# Altium PCB ALTAIR_PD_Soldier_V26.4c.PcbDoc (part 4 of 4)
Units mm, origin at the board's own origin, x right, y up, seen from the top; angles counter-clockwise.
Board outline 74 x 56 mm, 4 copper layers (Top Layer, Layer 1, Layer 2, Bottom Layer), stack 1.675 mm thick; 191 components, 116 nets, 579 pads, 435 vias.
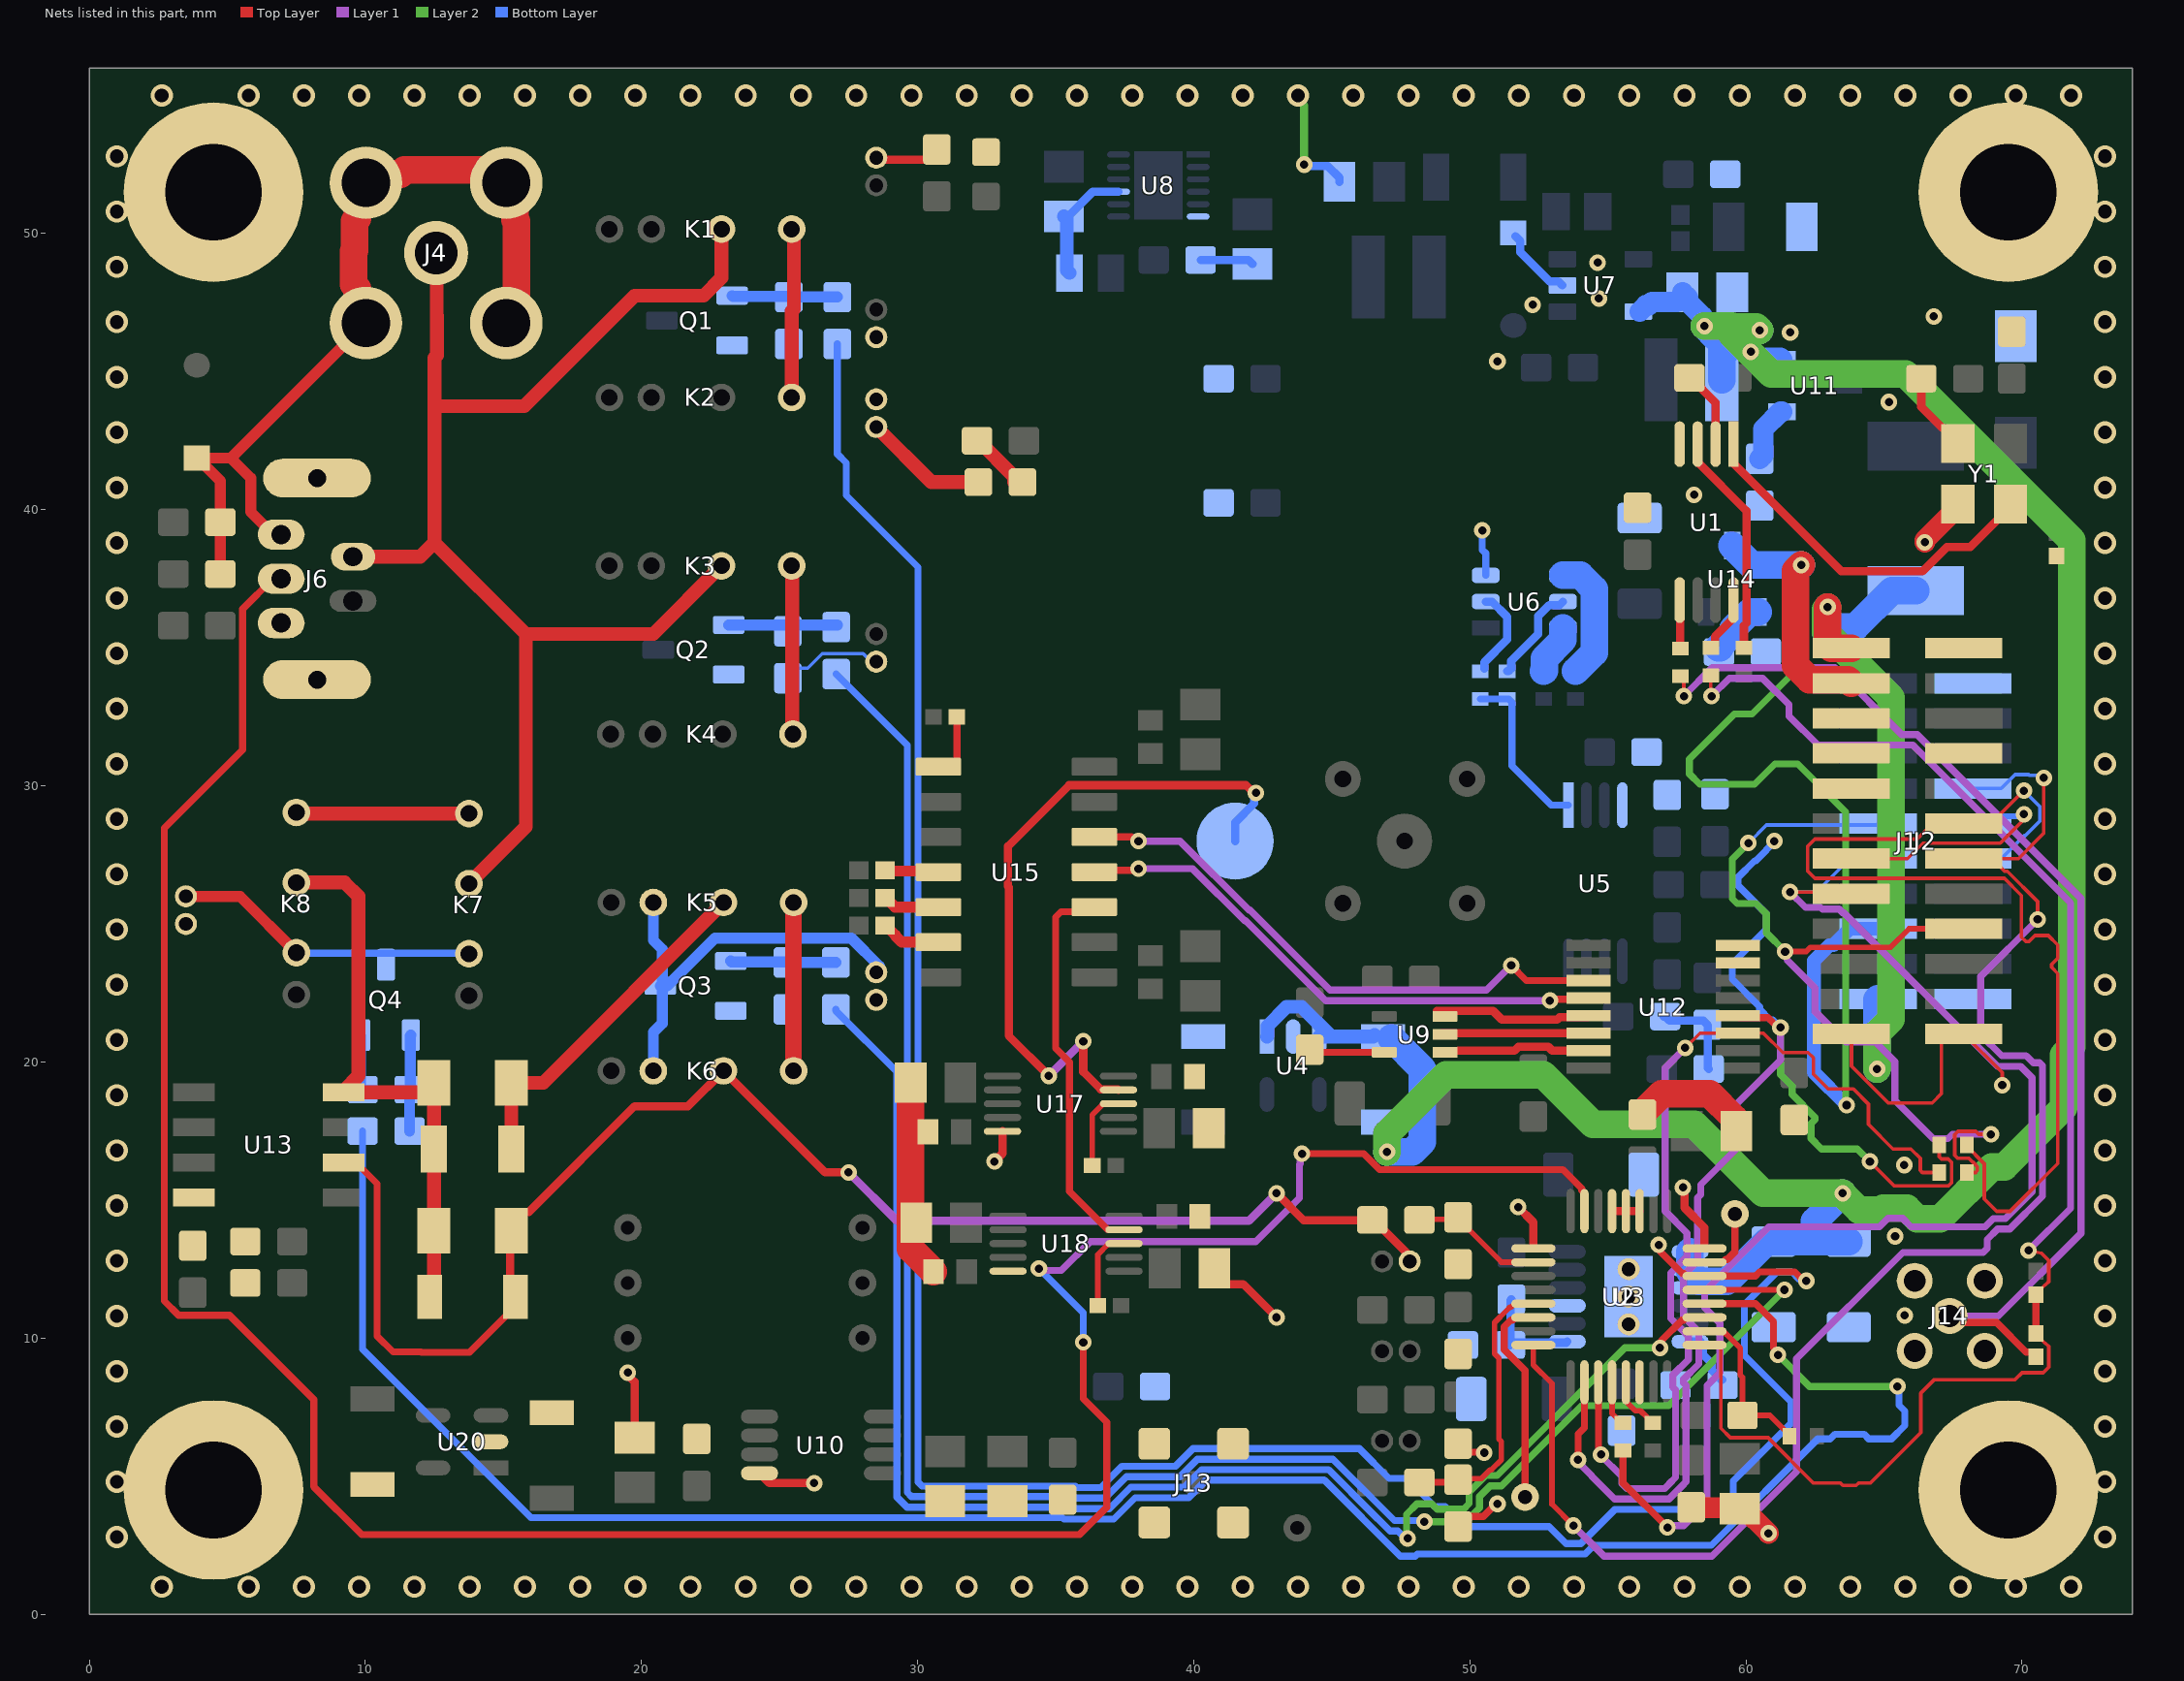
[diagram p5: the nets of this part, all layers, seen from the top]

## Via types
v1: diameter 0.6, hole 0.3, Top Layer to Bottom Layer, tented both sides, 157 vias
v2: diameter 0.6, hole 0.3, Top Layer to Bottom Layer, 156 vias
v3: diameter 0.8, hole 0.5, Top Layer to Bottom Layer, 122 vias

## Nets (pads, with @x,y where several pads share a name; then routed paths per layer and width w, separated by ;. In a path a pad name is that pad's centre, name@x,y a point inside that pad or via, vN(x,y) a via of type N, cw(c..) or ccw(c..) an arc to the next point about the centre after c; other vN are vias at no path point) (continued)
NetD5_1: D5.1 R54.1 | length 2.1
  Top Layer w0.5: R54.1@32.15,42.5 32.2,42.5 33.5,41.2 D5.1@33.5,41
NetD5_2: D5.2 JLEDN1.1 | length 4.5
  Top Layer w0.5: JLEDN1.1@28.5,43 30.5,41 D5.2@32.2,41
NetJ6_3: J6.3 U2.31 | length 101.3
  Top Layer w0.254: J6.3@6.95,37.5 6.65,37.5 5.551,36.401 5.551,31.305 2.719,28.473 2.719,11.345 3.238,10.826 5.076,10.826 8.131,7.771 8.131,4.619 9.86,2.89 35.865,2.89 36.849,3.875 36.849,6.958 36,7.807 v1(36,9.853) ; v1(43.921,16.681) 46.152,16.681 46.732,16.101 53.37,16.101 54.054,15.417 54.054,15.358 54.15,15.262 U2.31@54.15,14.6
  Layer 1 w0.254: v1(34.395,12.52) 34.461,12.454 34.947,12.454 34.949,12.453 35.203,12.453 36.25,13.5 42.25,13.5 43.825,15.075 43.825,16.296 43.855,16.327 43.855,16.615 v1(43.921,16.681)
  Bottom Layer w0.254: v1@34.5,12.5 34.5,12.415 36,10.915 v1(36,9.853)
NetJ9_1: J9.1 U17.9 | length 25.4
  Top Layer w0.3: v1(34.75,19.5) 33.299,20.951 33.299,26.334 33.277,26.356 33.277,27.811 35.489,30.023 41.896,30.023 42.169,29.75 v1(42.25,29.75) ; v1(36,20.75) 36,19.646 36.631,19.015 37.25,19.015 U17.9@37.275,18.99
  Layer 1 w0.3: v1(34.75,19.5) v1(36,20.75)
  Bottom Layer w0.3: J9.1@41.5,28 41.5,28.676 42.193,29.369 42.193,29.693 v1(42.25,29.75)
NetJ14_1: J14.1 R70.1 R72.1 | length 40.9
  Top Layer w0.127: R70.1@57.625,33.975 57.75,33.85 v1(57.75,33.25)
  Top Layer w0.254: J14.1@67.38,10.805 67.663,10.805 67.902,10.566 69.077,10.566 70.145,9.498 70.352,9.498 70.5,9.35 R72.1@70.5,9.325
  Layer 1 w0.254: v1(57.75,33.25) 58.778,34.278 63.222,34.278 65.641,31.859 66.198,31.859 72.137,25.921 72.137,13.798 69.144,10.805 J14.1@67.38,10.805
NetJLED_2: JLED.2 R18.2 | length 1.6
  Top Layer w0.3: JLED.2@28.775,52.675 R18.2@30.346,52.675
NetK1_4: K1.4 K2.4 | length 6.3
  Top Layer w0.4: K2.4@25.438,44.062 K2.4@25.5,44
  Top Layer w0.5: K2.4@25.438,44.062 25.438,47.188 25.52,47.27 25.52,50.081 K1.4@25.438,50.163
NetK3_4: K3.4 K4.4 | length 6
  Top Layer w0.4: K3.4@25.438,37.971 K3.4@25.461,37.947 ; K4.4@25.461,32.039 K4.4@25.5,32
  Top Layer w0.5: K4.4@25.461,32.039 K3.4@25.461,37.947
NetK5_4: K5.4 K6.4 | length 6.1
  Top Layer w0.6: K5.4@25.5,25.75 25.509,25.741 K6.4@25.509,19.682
NetK7_4: K7.4 K8.4 | length 6.3
  Top Layer w0.5: K8.4@7.5,29 K7.4@13.75,29
NetQ1_1: Q1.1 R36.1 R37.1 | length 3.8
  Bottom Layer w0.4: Q1.1@23.284,47.753 23.309,47.728 25.313,47.728 R37.1@25.338,47.703 R36.1@27.092,47.703
NetQ2_1: Q2.1 R39.1 R40.1 | length 3.9
  Bottom Layer w0.4: Q2.1@23.157,35.831 R40.1@25.294,35.831 ; R40.1@25.3,35.825 R39.1@27.1,35.825
NetQ3_1: Q3.1 R42.1 R43.1 | length 3.8
  Bottom Layer w0.4: Q3.1@23.232,23.657 23.257,23.632 25.261,23.632 R43.1@25.286,23.607 R42.1@27.04,23.607
NetQ4_1: Q4.1 R38.1 R41.1 | length 3.5
  Bottom Layer w0.4: R38.1@11.6,17.5 R41.1@11.6,19 11.625,19.025 11.625,20.95 Q4.1@11.65,20.975
NetR1_2: R1.2 R2.2 U2.18 | length 6.1
  Top Layer w0.2: U2.18@58.5,10.25 59.177,10.25 59.3,10.127 59.306,10.127 59.794,9.639 59.794,8.659 59.871,8.582 R1.2@59.871,7.204 60.863,7.204 61.571,6.496 R2.2@61.571,6.446
NetR14_2: R14.2 U3.6 | length 2.1
  Bottom Layer w0.3: U3.6@57.975,9.875 58.346,9.875 58.438,9.783 58.438,9.412 58.75,9.1 58.75,8.85 59.1,8.5 R14.2@59.15,8.5
NetR16_1: R16.1 R17.2 U3.7 | length 3.8
  Bottom Layer w0.3: R16.1@51.5,11.4 51.475,11.375 51.475,9.775 R17.2@51.45,9.75 51.537,9.837 53.487,9.837 U3.7@53.525,9.875
NetR25_1: R25.1 U6.2 | length 3.2
  Bottom Layer w0.3: R25.1@50.525,34.25 50.525,34.475 51.352,35.302 51.352,36.123 50.8,36.675 U6.2@50.575,36.675
NetR25_2: R25.2 R26.2 U5.1 | length 6.1
  Bottom Layer w0.254: R25.2@50.375,33.15 51.4,33.15 51.523,33.027 51.523,30.727 52.95,29.3 U5.1@53.575,29.3
NetR26_1: R26.1 U6.5 | length 3.6
  Bottom Layer w0.3: R26.1@51.35,34.15 51.4,34.15 51.5,34.25 51.5,34.525 52.475,35.5 52.475,36.15 52.875,36.55 53.25,36.55 U6.5@53.375,36.675
NetR27_2: R27.2 U6.6 | length 1.9
  Bottom Layer w1: R27.2@52.675,34.15 52.698,34.173 52.698,34.617 53.375,35.294 U6.6@53.375,35.725
NetR28_2: R28.2 U6.4 | length 4.6
  Bottom Layer w1: U6.4@53.375,37.625 54.006,37.625 54.502,37.129 54.502,34.827 R28.2@53.825,34.15
NetR36_2: R36.2 U2.22 | length 92.3
  Top Layer w0.254: v1(56.837,13.377) 56.903,13.311 56.903,13.126 57.683,12.346 57.742,12.346 57.838,12.25 U2.22@58.5,12.25 60.34,12.25 60.487,12.397 61.771,12.397 62.091,12.077 v1(62.185,12.077)
  Bottom Layer w0.254: R36.2@27.092,46.003 27.092,42.019 27.414,41.697 27.414,40.52 30.012,37.922 30.012,4.792 30.161,4.643 35.722,4.643 35.777,4.588 36.628,4.588 37.405,5.365 39.34,5.365 39.975,6 45.995,6 47.072,4.924 47.699,4.924 48.722,3.9 49.1,3.9 49.822,3.178 52.866,3.178 53.482,2.563 54.018,2.563 55.249,3.794 59.209,3.794 59.536,4.121 59.536,4.823 61.629,6.916 61.629,7.696 59.946,9.379 59.946,11.215 61.128,12.397 61.664,12.397 61.918,12.143 62.119,12.143 v1(62.185,12.077)
NetR38_2: R38.2 U2.20 | length 80.5
  Top Layer w0.254: U2.20@58.5,11.25 60.344,11.25 61,10.594 61,9.646 61.158,9.488 v1(61.158,9.395)
  Layer 2 w0.254: v1(61.158,9.395) 62.303,8.25 v1(65.484,8.25)
  Bottom Layer w0.254: R38.2@9.9,17.5 9.9,9.6 16,3.5 35.248,3.5 35.303,3.445 37.102,3.445 37.879,4.222 39.813,4.222 40.448,4.857 44.728,4.857 47.482,2.103 48.018,2.103 48.097,2.182 54.176,2.182 54.494,2.5 58.75,2.5 62.603,6.353 63.051,6.353 63.222,6.524 64.278,6.524 64.449,6.353 65.268,6.353 65.75,6.835 65.75,7.363 65.544,7.569 65.544,8.19 v1(65.484,8.25)
NetR39_2: R39.2 U2.21 | length 70.7
  Top Layer w0.2: U2.21@58.5,11.75 61.385,11.75 v1@61.392,11.743
  Layer 2 w0.254: v1(48.354,3.354) 49.858,3.354 50.353,3.849 50.353,4.268 50.732,4.647 51.151,4.647 54.056,7.552 57.198,7.552 v1(61.396,11.75)
  Bottom Layer w0.254: R39.2@27.05,34.05 29.631,31.469 29.631,4.411 29.78,4.262 35.564,4.262 35.619,4.207 36.786,4.207 37.563,4.984 39.498,4.984 40.133,5.619 45.044,5.619 47.266,3.397 48.311,3.397 v1(48.354,3.354)
NetR42_2: R42.2 U2.19 | length 54
  Top Layer w0.254: v1(56.884,9.651) 56.951,9.717 56.951,9.922 57.683,10.654 57.742,10.654 57.838,10.75 U2.19@58.5,10.75
  Layer 2 w0.254: v1(47.75,2.75) 47.707,2.793 47.707,3.622 48.086,4.001 48.622,4.001 48.811,3.811 49.777,3.811 49.972,4.007 49.972,4.426 50.574,5.028 50.993,5.028 55.616,9.651 v1(56.884,9.651)
  Bottom Layer w0.254: R42.2@27.04,21.907 27.04,21.857 29.25,19.647 29.25,4.25 29.619,3.881 35.406,3.881 35.461,3.826 36.944,3.826 36.999,3.881 37.721,4.603 39.655,4.603 40.052,5 40.29,5.238 44.886,5.238 45.124,5 46.243,3.881 47.108,3.016 47.39,3.016 47.656,2.75 v1(47.75,2.75)
NetR52_2: R52.2 U11.1 | length 2.1
  Bottom Layer w0.75: R52.2@60.5,41.85 60.625,41.975 60.625,42.925 61.25,43.55 U11.1@61.3,43.55
NetR53_2: R53.2 U14.1 | length 2.1
  Bottom Layer w1: R53.2@59,35 59.05,35 59.05,35.05 59.523,35.523 59.523,35.686 60.137,36.3 U14.1@60.45,36.3
NetR58_2: R58.2 U15.4 | length 2
  Top Layer w0.4: R58.2@28.825,26.95 28.86,26.915 30.715,26.915 U15.4@30.75,26.881
NetR59_2: R59.2 U15.5 | length 2.1
  Top Layer w0.4: R59.2@28.825,25.946 28.85,25.946 29.185,25.611 U15.5@30.75,25.611
NetR60_2: R60.2 U15.6 | length 2.2
  Top Layer w0.4: R60.2@28.825,24.941 28.85,24.941 29.191,24.6 29.191,24.575 29.425,24.341 U15.6@30.75,24.341
NetR61_1: R61.1 U15.1 | length 2.4
  Top Layer w0.254: U15.1@30.75,30.691 31.227,30.691 31.425,30.889 R61.1@31.425,32.5
NetR62_1: R62.1 U17.8 | length 2.9
  Top Layer w0.2: R62.1@36.325,16.25 36.325,18.09 36.735,18.5 U17.8@37.25,18.5
NetR63_1: R63.1 U18.8 | length 2.4
  Top Layer w0.2: R63.1@36.525,11.185 36.525,13.025 U18.8@36.935,13.435
NetR64_1: R64.1 U2.12 | length 1.7
  Top Layer w0.2: U2.12@55.15,8.4 55.15,7.275 55.496,6.929 R64.1@55.546,6.929
NetR65_1: R65.1 U2.13 | length 2
  Top Layer w0.2: U2.13@55.647,7.72 55.994,7.373 56.177,7.373 56.421,7.129 56.421,7.079 56.571,6.929 R65.1@56.621,6.929 ; U2.13@55.65,7.723 U2.13@55.65,8.4
NetR66_1: R66.1 Y1.1 | length 3
  Top Layer w0.3: R66.1@66.35,44.75 66.35,43.725 67.125,42.95 67.225,42.95 67.675,42.5 Y1.1@67.675,42.4
NetR67_1: R67.1 U1.2 | length 2.8
  Top Layer w0.3: R67.1@57.95,44.775 58,44.775 58.9,43.875 U1.2@58.9,42.375
NetR68_2: R68.2 U1.3 | length 8.1
  Top Layer w0.3: U1.3@58.25,42.375 58.25,41.727 60.017,39.96 60.017,35.894 59.925,35.801 R68.2@59.925,35
NetR69_1: R69.1 R71.1 R72.2 U2.17 | length 54.9
  Top Layer w0.127: U2.17@58.5,9.75 59.007,9.75 59.087,9.67 59.087,6.742 59.434,6.395 60.803,6.395 62.448,4.75 63.425,4.75 63.508,4.667 63.992,4.667 64.075,4.75 64.5,4.75 66.333,6.583 66.333,8.009 66.824,8.5 69.75,8.5 70,8.75 70.769,8.75 70.966,8.946 70.966,9.704 70.854,9.815 70.835,9.815 70.5,10.15 R72.2@70.5,10.175 ; R69.1@58.725,34 58.725,33.275 v1(58.75,33.25) ; v1(70.23,13.177) 70.705,13.074 70.779,12.999 70.966,12.813 70.966,12.046 70.854,11.934 70.835,11.934 70.5,11.6 R71.1@70.5,11.575
  Top Layer w0.254: R72.2@70.5,10.175 R71.1@70.5,11.575
  Layer 1 w0.254: v1(58.75,33.25) 59.397,33.897 60.603,33.897 61.556,32.944 61.556,32.529 62.607,31.478 66.04,31.478 71.756,25.763 71.756,14.703 v1(70.23,13.177)
NetR69_2: R69.2 U1.8 | length 2.1
  Top Layer w0.3: R69.2@58.725,35 58.775,35 58.875,35.1 58.875,35.401 59.55,36.076 U1.8@59.55,36.725
NetR70_2: R70.2 U1.5 | length 1.8
  Top Layer w0.3: U1.5@57.6,36.725 57.612,36.712 57.612,34.987 R70.2@57.625,34.975
NetTP8_1: TP8.1 U2.23 | length 2.6
  Top Layer w0.254: U2.23@58.5,12.75 59.162,12.75 59.258,12.846 59.317,12.846 59.6,13.129 TP8.1@59.6,14.5
NetTP9_1: TP9.1 U2.6 | length 7.7
  Top Layer w0.254: TP9.1@52,4.25 52,8.829 51.246,9.583 51.246,10.417 51.483,10.654 51.542,10.654 51.638,10.75 U2.6@52.3,10.75
NetU1_1: U1.1 Y1.3 | length 12.6
  Top Layer w0.3: U1.1@59.59,41.635 63.45,37.775 66.4,37.775 67.275,38.65 68.125,38.65 69.125,39.65 69.575,40.1 Y1.3@69.575,40.2
NetU9_1: U9.1 U12.15 | length 4.8
  Top Layer w0.3: 49.573,20.412 51.62,20.412 51.76,20.552 52.843,20.552 52.982,20.412 U12.15@54.3,20.412
NetU9_2: U9.2 U12.14 | length 5.3
  Top Layer w0.3: U9.2@48.982,21.047 U12.14@54.3,21.047
NetU9_3: U9.3 U12.13 | length 5.7
  Top Layer w0.3: 48.8,21.85 50.841,21.85 51.154,21.537 53.16,21.537 53.251,21.627 54.245,21.627 U12.13@54.3,21.682
NetU12_11: U12.11 U15.12 | length 20.8
  Top Layer w0.254: U15.12@36.4,28.151 37.755,28.151 37.906,28 v1(38,28) ; v1(51.5,23.5) 52.048,22.952 U12.11@54.3,22.952
  Layer 1 w0.254: v1(38,28) 39.5,28 42,25.5 42.039,25.5 44.935,22.604 50.604,22.604 v1(51.5,23.5)
NetU12_12: U12.12 U15.11 | length 20
  Top Layer w0.254: U15.11@36.4,26.881 36.46,26.94 37.941,26.94 v1(38,27) ; v1(52.898,22.223) 52.946,22.27 54.253,22.27 U12.12@54.3,22.317
  Layer 1 w0.254: v1(38,27) 39.961,27 41.842,25.119 41.881,25.119 44.777,22.223 v1(52.898,22.223)
NetU15_10: U15.10 U18.9 | length 14.2
  Top Layer w0.254: U15.10@36.4,25.611 36.233,25.444 35.194,25.444 35,25.25 35,20.5 35.5,20 35.5,15.314 36.887,13.927 37.473,13.927 U18.9@37.475,13.925
PD_A: J4.1 J6.2 K1.3 K3.3 K7.3 | length 50.8
  Top Layer w0.5: J6.2@9.55,38.3 11.99,38.3 12.5,38.81 ; J4.1@12.561,49.3 12.58,49.281 12.58,47.033 12.595,47.018 12.595,45.595 12.5,45.5 12.5,43.75 ; K7.3@13.75,26.25 K7.3@13.75,26.46 15.81,28.52 15.81,35.5 ; K1.3@22.898,50.163 22.898,48.398 22.25,47.75 19.75,47.75 15.75,43.75 12.5,43.75 ; K3.3@23,38 22.927,38 K3.3@22.898,37.971 20.427,35.5 15.81,35.5 ; 12.5,38.81 12.5,43.75 ; 12.5,38.81 15.81,35.5
PD_K: C0.2 D3.1 J4.2 J4.3 J4.4 J4.5 J6.1 R0.2 | length 33.1
  Top Layer w0.254: 15.475,49.5 15.525,49.45
  Top Layer w0.4: D3.1@3.897,41.871 5.129,41.871 ; D3.1@3.922,41.871 4.747,41.046 C0.2@4.747,39.551 R0.2@4.747,37.676 ; J6.1@6.95,39.1 6.668,39.1 5.846,39.922 5.846,41.154 5.249,41.751 5.129,41.871 ; 9.566,49.366 9.6,49.4 ; J4.3@10.021,46.76 5.132,41.871 5.129,41.871
  Top Layer w1: 9.566,49.366 9.566,48.158 9.71,48.014 9.71,47.071 J4.3@10.021,46.76 ; 9.6,49.4 9.6,50.442 9.71,50.552 9.71,51.529 J4.5@10.021,51.84 10.021,52.3 10.17,52.151 11.27,52.151 11.42,52.3 14.202,52.3 14.662,51.84 J4.4@15.101,51.84 15.412,51.529 15.412,50.505 15.475,50.442 15.475,49.5 15.475,47.573 15.101,47.2 J4.2@15.101,46.76
rSPI_MOSI: R5.2 U2.10 U12.4 | length 49.1
  Top Layer w0.127: v1(64.489,16.398) 65.378,15.51 67.329,15.51 67.441,15.621 67.441,16.379 67.329,16.491 67.074,16.491 67,16.565 R5.2@67,17
  Top Layer w0.254: v1(53.919,5.591) 53.919,6.529 54.15,6.76 U2.10@54.15,8.4 ; U12.4@59.7,21.682 59.778,21.604 60.802,21.604 61.156,21.25 v1(61.25,21.25)
  Layer 1 w0.254: v1(53.919,5.591) 53.919,5.467 53.948,5.467 54.018,5.397 54.036,5.397 54.415,5.018 54.415,5 55.24,4.175 57.215,4.175 57.738,4.698 57.738,4.709 57.83,4.801 57.83,8.285 57.738,8.377 57.738,8.512 58.293,9.067 58.293,10.234 57.738,10.79 57.738,12.286 58.246,12.794 58.246,15.085 58.363,15.202 58.363,15.563 59.62,16.82 59.62,18.442 61.25,20.071 v1(61.25,21.25)
  Layer 2 w0.254: v1(61.25,21.25) 61.25,19.557 61.671,19.136 61.671,18.829 62.5,18 62.5,17.915 62.353,17.768 62.353,17.232 62.732,16.853 64.034,16.853 v1(64.489,16.398)
  Bottom Layer w0.254: v1(61.027,28) 61.027,27.971 60.734,27.678 60.734,27.663 60.355,27.284 60.31,27.284 59.704,26.677 59.704,26.398 60.741,25.362 60.741,24.8 59.5,23.56 59.5,23 60.495,22.005 60.495,21.905 60.874,21.526 60.974,21.526 v1(61.25,21.25)
rSPI_SCLK: R11.2 U2.11 U12.3 | length 35.8
  Top Layer w0.127: v1(57.8,20.516) 58.332,21.047 U12.3@59.7,21.047 60.627,21.047 61.334,20.341 62.256,20.341 62.441,20.156 62.441,19.56 62.978,19.022 63.889,19.022 64.437,18.473 64.437,17.742 65.326,16.853 65.972,16.853 66.313,16.512 66.313,16.074 66.388,16 R11.2@67,16
  Top Layer w0.254: U2.11@54.65,8.4 54.659,8.391 54.659,5.841 54.714,5.786 v1(54.75,5.786)
  Layer 1 w0.254: v1(54.75,5.786) 54.732,5.768 55.506,4.994 55.506,4.728 55.678,4.556 57.057,4.556 57.228,4.728 57.228,4.738 57.449,4.959 57.449,8.128 57.357,8.219 57.357,8.67 57.912,9.225 57.912,10.077 57.277,10.712 57.277,12.364 57.865,12.952 57.865,13.803 57.069,14.599 57.069,19.785 v1(57.8,20.516)
SPI_MISO: J1.15 J2.11 R64.2 | length 48.5
  Top Layer w0.127: v1(61.597,26.157) 63.758,26.157 J1.15@63.82,26.095
  Top Layer w0.254: R64.2@55.546,5.929 55.546,4.758 v1(57.157,3.147)
  Layer 1 w0.254: v1(57.157,3.147) 57.223,3.213 57.752,3.213 58.592,4.053 58.592,8.288 59.055,8.752 59.055,10.55 58.5,11.105 58.5,11.7 60.829,14.029 64.828,14.029 65.134,14.336 65.67,14.336 65.977,14.029 68.656,14.029 68.96,14.333 69.393,14.333 70.357,15.297 70.357,19.434 69.944,19.847 69.108,19.847 63.553,25.402 63.51,25.402 63.377,25.535 62.769,25.535 62.702,25.601 62.153,25.601 v1(61.597,26.157)
  Bottom Layer w0.127: v1(61.597,26.157) 62.55,26.157 63.757,27.365 J2.11@64.786,27.365
SPI_MOSI: J1.12 J2.12 R5.1 | length 39
  Top Layer w0.127: R5.1@68,17 68,16.95 68.634,16.316 68.634,15.041 69.081,14.594 69.564,14.594 71.291,16.321 71.291,23.209 71.071,23.429 71.071,23.534 71.291,23.755 71.291,24.238 70.95,24.58 70.466,24.58 70.246,24.36 70.14,24.36 69.979,24.521 69.979,25.9 69.979,26.034 69.36,26.654 68.346,26.654 62.497,26.654 62.233,26.918 62.233,27.812 62.497,28.076 66.201,28.076 66.9,28.775 69.013,28.775 v1(70.066,29.828)
  Bottom Layer w0.127: J2.12@68.214,27.365 69.243,27.365 70.078,28.2 70.117,28.2 70.647,28.73 70.647,29.247 v1(70.066,29.828)
SPI_SCLK: J1.18 J2.09 R11.1 | length 32.7
  Top Layer w0.127: R11.1@68,16 68.317,16 68.38,16.062 68.38,16.211 68.295,16.295 68.081,16.509 67.671,16.509 67.559,16.621 67.559,17.379 67.671,17.49 68.329,17.49 68.44,17.379 68.446,17.384 v1(68.872,17.384)
  Top Layer w0.2: v1(61.417,24) 62.179,24 62.329,24.15 65.232,24.15 65.906,24.825 J1.18@67.884,24.825
  Layer 1 w0.254: v1(61.417,24) 61.483,23.934 61.483,23.705 62.5,22.687 62.5,21.837 63.617,20.72 64.695,20.72 65.397,20.018 65.397,18.612 66.781,17.228 67.317,17.228 67.473,17.384 v1(68.872,17.384)
  Layer 2 w0.254: v1(60.087,27.931) 59.5,27.344 59.5,25.917 59.676,25.741 60.362,25.741 60.741,25.362 60.741,24.676 v1(61.417,24)
  Bottom Layer w0.127: v1(60.087,27.931) 60.74,28.583 64.734,28.583 J2.09@64.786,28.635
STRT1: J1.13 J2.10 | length 9
  Top Layer w0.127: J1.13@63.82,27.365 65.849,27.365 66.408,27.924 69.208,27.924 69.973,28.69 69.973,28.883 v1(70.064,28.973)
  Bottom Layer w0.2: J2.10@68.214,28.635 68.483,28.903 69.994,28.903 v1(70.064,28.973)
STRT2: J1.14 J2.08 U2.8 | length 57.1
  Top Layer w0.127: v1(70.563,25.164) 70.563,25.81 69.465,26.908 69.37,26.908 68.913,27.365 J1.14@67.884,27.365 69.865,27.365 70.784,28.284 v1(70.784,30.29)
  Top Layer w0.2: U2.8@52.3,9.75 52.3,9.029 52.972,8.357 52.972,3.988 v1(53.75,3.21)
  Layer 1 w0.254: v1(53.75,3.21) 54.857,2.103 58.768,2.103 61.831,5.166 61.831,9.254 65.683,13.106 68.59,13.106 68.739,13.255 68.739,13.573 69.118,13.952 69.551,13.952 70.738,15.139 70.738,19.865 70.631,19.972 70.402,19.972 70.146,20.228 69.265,20.228 68.5,20.993 68.5,23.101 v1(70.563,25.164)
  Bottom Layer w0.127: J2.08@68.214,29.905 69.243,29.905 69.75,30.412 70.23,30.412 70.261,30.381 70.694,30.381 v1(70.784,30.29)
SYS_DVDD: J1.03 J2.15 U14.3 | length 44.4
  Top Layer w1: v1(62,38) 61.796,37.796 61.796,34.357 62.306,33.847 63.688,33.847 J1.03@63.82,33.715
  Layer 2 w0.254: v1(62,38) 62,34.378 60.225,32.603 59.584,32.603 57.951,30.97 57.951,30.434 58.33,30.055 60.312,30.055 61.051,30.794 61.875,30.794 63.615,29.054 63.615,18.47 v1(63.647,18.438)
  Bottom Layer w0.5: v1(63.647,18.438) 62.46,19.625 62.46,23.669 63.025,24.235 63.167,24.235 63.757,24.825 J2.15@64.786,24.825
  Bottom Layer w1: U14.3@59.5,38.7 60.2,38 v1(62,38)
SYS_GND: C1.1 C2.1 C3.1 C4.1 C5.2 C6.1 C7.2 C8.1 C9.1 C10.1 C11.1 C12.1 C13.1 C14.1 C17.2 C18.2 C19.2 C20.2 C21.2 C24.2 C26.1 C28.1 C29.1 C32.1 C43.1 C44.1 C45.1 C46.1 C47.1 C48.1 C49.1 C50.1 C51.1 C52.1 C53.1 C54.1 C56.1 C57.1 C58.2 C59.2 C61.1 C62.1 C63.1 C64.1 C65.2 C66.2 D1.1 D2.1 D4.2 H1.1 H2.1 H3.1 H4.1 J1.02 J1.05 J1.07 J1.08 J1.09 J1.23 J1.24 J2.02 J2.20 J6.5 J6.6 J10.1 J11.1 J12.1 J13.2 J14.2 J14.3 J14.4 J14.5 J15.1 JLEDN1.2 Q1.2 Q2.2 Q3.2 Q4.2 R14.1 R15.1 R17.1 R22.1 R24.1 R31.1 R32.2 R34.2 R35.2 R37.2 R40.2 R41.2 R43.2 R52.1 R53.1 R99.1 RT1.1 U1.4 U2.1 U2.14 U2.24 U2.27 U2.28 U2.29 U3.9 U3.13 U4.2 U5.4 U6.3 U7.2 U8.6 U8.9 U10.4 U12.7 U12.8 U13.4 U17.5 U18.5 U20.2 Y1.2 | length 67.9
  Top Layer w0.127: J1.23@63.82,21.015 63.82,19.855 65.153,18.522 66.742,18.522 67.083,18.863 67.083,20.71 67.388,21.015 J1.24@67.884,21.015 69.281,19.618 v1(69.281,19.161)
  Top Layer w0.254: C64.1@49.571,3.179 49.938,3.546 50.491,3.546 50.946,4 v1(51,4) ; C63.1@49.571,6.179 49.883,5.867 50.509,5.867 v1(50.523,5.853)
  Top Layer w0.3: v1(19.5,8.75) 19.5,8.669 19.75,8.419 C6.1@19.75,6.4 ; U10.4@24.275,5.108 24.633,4.75 v1(26.25,4.75) ; v1(32.781,16.398) 33.075,16.693 U17.5@33.075,17.49 ; C48.1@40.75,12.535 40.75,12.385 41.175,11.96 41.79,11.96 v1(43,10.75) ; v1(51.75,14.75) 52.3,14.2 U2.1@52.3,13.25 ; U2.29@55.15,14.6 U2.27@56.15,14.6 ; v1(57.716,15.456) 57.773,15.399 57.773,14.728 58.5,14.002 U2.24@58.5,13.25
  Top Layer w0.75: C53.1@58.021,3.879 58.046,3.854 59.75,3.854 C54.1@59.775,3.829 59.925,3.829 60.817,2.937 v1(60.817,2.932) ; v1(66.475,38.825) 66.475,38.9 67.675,40.1 Y1.2@67.675,40.2
  Top Layer w1: C46.1@29.75,19.25 29.75,13.235 C49.1@30.575,12.41 ; C51.1@56.25,18.1 56.25,18.15 56.952,18.852 58.685,18.852 59.575,17.962 59.575,17.575 C52.1@59.65,17.5
  Layer 2 w0.3: v3(43.775,55) 43.775,54.865 44,54.64 v1(44,52.5)
  Bottom Layer w0.127: R40.2@25.3,33.9 25.662,34.262 26.015,34.262 26.544,34.791 28.027,34.791 28.318,34.5 J11.1@28.5,34.5
  Bottom Layer w0.254: v1(50.45,39.25) 50.45,38.55 50.575,38.425 U6.3@50.575,37.625
  Bottom Layer w0.3: Q4.2@9.85,20.975 9.875,20.95 9.875,19.025 R41.2@9.9,19 ; C20.2@35.45,50.625 36.342,51.517 U8.9@37.278,51.517 ; R32.2@40.25,49.05 41.975,49.05 C19.2@42.125,48.9 ; v1(44,52.5) 44.05,52.45 44.85,52.45 45.275,52.025 C18.2@45.275,51.875 ; D1.1@51.646,49.909 51.649,49.909 51.828,49.73 51.828,49.322 52.875,48.275 53.2,48.275 U7.2@53.35,48.125 ; C10.1@57.025,21.65 C10.1@57.075,21.65 57.225,21.5 58.45,21.5 R22.1@58.6,21.35 58.625,21.325 58.625,19.775 C9.1@58.65,19.75
  Bottom Layer w0.5: C20.2@35.3,50.625 35.4,50.525 35.4,48.675 C21.2@35.5,48.575
  other v1: 65.75,10.825 65.402,13.689 65.73,16.27 58.124,40.545 65.175,43.9 51,45.375 61.6,46.425 66.8,47 52.275,47.425 54.675,47.65 54.625,48.948
  other v3: 2.625,1 5.775,1 7.775,1 9.775,1 11.775,1 13.775,1 15.775,1 17.775,1 19.775,1 21.775,1 23.775,1 25.775,1 27.775,1 29.775,1 31.775,1 33.775,1 35.775,1 37.775,1 39.775,1 41.775,1 43.775,1 45.775,1 47.775,1 49.775,1 51.775,1 53.775,1 55.775,1 57.775,1 59.775,1 61.775,1 63.775,1 65.775,1 67.775,1 69.775,1 71.775,1 1,2.8 73,2.8 1,4.8 73,4.8 1,6.8 73,6.8 1,8.8 73,8.8 1,10.8 73,10.8 1,12.8 73,12.8 1,14.8 73,14.8 1,16.8 73,16.8 1,18.8 73,18.8 1,20.8 73,20.8 1,22.8 73,22.8 1,24.8 73,24.8 1,26.8 73,26.8 1,28.8 73,28.8 1,30.8 73,30.8 1,32.8 73,32.8 1,34.8 73,34.8 1,36.8 73,36.8 1,38.8 73,38.8 1,40.8 73,40.8 1,42.8 73,42.8 1,44.8 73,44.8 1,46.8 73,46.8 1,48.8 73,48.8 1,50.8 73,50.8 1,52.8 73,52.8 2.625,55 5.775,55 7.775,55 9.775,55 11.775,55 13.775,55 15.775,55 17.775,55 19.775,55 21.775,55 23.775,55 25.775,55 27.775,55 29.775,55 31.775,55 33.775,55 35.775,55 37.775,55 39.775,55 41.775,55 45.775,55 47.775,55 49.775,55 51.775,55 53.775,55 55.775,55 57.775,55 59.775,55 61.775,55 63.775,55 65.775,55 67.775,55 69.775,55 71.775,55
SYS_VBAT: F1.1 J1.01 J2.19 | length 26.7
  Top Layer w1: v1(62.96,36.48) 62.96,35.117 63.091,34.985 J1.01@63.82,34.985
  Layer 2 w1: v1(62.96,36.48) 62.875,36.395 62.875,35.575 65.25,33.2 65.25,21.545 64.75,21.045 v1(64.75,19.75)
  Bottom Layer w1: 62.875,35.575 63.05,35.75 63.965,35.75 65.29,37.075 F1.1@66.15,37.075 ; v1(64.75,19.75) 64.75,22.249 J2.19@64.786,22.285
TIA_ADCIN: C61.2 R73.2 U2.2 | length 4.9
  Top Layer w0.2: R73.2@48.171,14.279 48.196,14.304 C61.2@49.546,14.304 ; C61.2@49.571,14.379 49.571,14.329 51.15,12.75 52.292,12.75 U2.2@52.321,12.779
TIA_GAIN_OUT: C31.2 K5.3 R46.2 | length 12.9
  Top Layer w0.5: C31.2@15.25,16.75 15.283,16.783 R46.2@15.283,19.25 16.441,19.25 K5.3@22.969,25.778
TIA_GAIN_RELAY_GND: J12.2 K5.2 K6.2 Q3.3 | length 15.4
  Bottom Layer w0.4: K6.2@20.429,19.682 20.429,21.078 20.75,21.399 20.75,24.088 20.429,24.409 K5.2@20.429,25.778 ; Q3.3@20.682,22.757 20.932,22.757 22.659,24.484 27.602,24.484 J12.2@28.611,23.475
TIA_IN: C30.1 C31.1 K8.3 R45.1 R46.1 U13.8 | length 20.4
  Top Layer w0.5: K8.3@7.5,26.5 9.25,26.5 9.75,26 9.75,19.5 U13.8@9.25,19 ; U13.8@9.212,18.905 12.155,18.905 R46.1@12.5,19.25 ; C30.1@12.25,12 12.433,12 12.483,12.05 R45.1@12.483,13.9 C31.1@12.483,16.85 ; C31.1@12.483,16.983 R46.1@12.483,19.25
TIA_OUT: C30.2 JTIA.1 K6.3 R45.2 R73.1 U13.6 | length 54.6
  Top Layer w0.254: U13.6@9.212,16.365 9.65,16.365 10.424,15.591 10.424,10.076 11,9.5 12.009,9.5 12.021,9.488 13.771,9.488 15.25,10.967 C30.2@15.25,11.683
  Top Layer w0.3: C30.2@15.25,11.683 15.25,14.092 15.733,14.575 15.925,14.575 19.75,18.4 21.687,18.4 K6.3@23,19.713 ; K6.3@22.969,19.682 26.651,16 v1(27.5,16) ; v1(43,15.25) 43.986,14.265 46.457,14.265 R73.1@46.471,14.279 ; R73.1@46.521,14.279 47.725,13.075 47.725,12.875 JTIA.1@47.821,12.779
  Layer 1 w0.3: v1(27.5,16) 29.25,14.25 42,14.25 v1(43,15.25)
TIA_RELAY_GND: J15.2 K7.2 K8.2 Q4.3 | length 11.1
  Top Layer w0.4: J15.2@3.5,26 5.46,26 K8.2@7.5,23.96
  Bottom Layer w0.254: K8.2@7.5,23.96 7.52,23.94 13.73,23.94 K7.2@13.75,23.92
VBAT: C1.2 C2.2 C14.2 C59.1 L1.1 U3.1 U3.2 U3.3 U4.1 U4.3 U7.5 U11.2 | length 99.7
  Layer 2 w1: v1(47,16.748) 47,17.406 49.131,19.537 52.667,19.537 54.461,17.743 58.131,17.743 60.623,15.25 v1(63.5,15.25) 63.5,15.229 64.086,14.643 64.914,14.643 64.98,14.709 65.825,14.709 66.204,14.33 67.032,14.33 68.9,16.198 69.353,16.198 71.504,18.349 71.504,20.254 71.804,20.554 71.804,38.897 65.781,44.92 60.918,44.92 59.497,46.341 59.497,46.628 ; v1(58.5,46.652) 59.473,46.652 59.497,46.628 ; v1(60.5,46.5) 60.372,46.628 59.497,46.628
  Bottom Layer w0.5: U4.1@42.65,20.925 42.666,20.941 42.666,21.302 43.364,22 43.901,22 44.976,20.925 ; U4.3@44.55,20.925 44.976,20.925 ; C59.1@46.55,20.975 46.5,20.925 44.976,20.925
  Bottom Layer w0.75: U7.5@56.15,47.175 56.381,47.406 56.485,47.406 56.605,47.525 57.5,47.525 57.7,47.725 C14.2@57.7,47.875 57.9,47.675 57.9,47.525 58.423,47.002 58.423,46.729 v1(58.5,46.652) ; L1.1@59.125,45.513 59.725,46.113 v1@60.177,45.661 ; v1(60.177,45.718) 60.383,45.512 60.383,45.5 61.25,45.5 U11.2@61.3,45.45
  Bottom Layer w1: v1(47,16.748) 47.91,16.748 48.277,17.115 48.277,19.748 C59.1@47.15,20.875 ; U3.1@57.975,13.125 U3.2@57.975,12.475 57.975,12.4 58.323,12.052 59.305,12.052 60.75,13.497 C1.2@61,13.497 62.487,13.497 ; v1(58.5,46.652) 58.896,46.256 59.125,46.256 ; L1.1@59.125,44.7 L1.1@59.125,45.6 ; L1.1@59.682,46.157 L1.1@59.125,45.6 ; v1(60.5,46.5) 59.369,46.5 59.125,46.256 ; v1(63.5,15.25) 62.487,14.237 62.487,13.497 ; C2.2@63.718,13.497 62.487,13.497 ; L1.1@59.125,45.6 59.125,46.256
VBIAS: R33.2 U9.6 | length 2.7
  Top Layer w0.254: R33.2@44.2,20.45 44.3,20.35 U9.6@46.9,20.35
VGND_ADCIN: C64.2 R76.2 U2.5 | length 9.8
  Top Layer w0.2: C64.2@49.571,4.915 50.415,4.915 50.733,5.233 50.78,5.233 51.143,5.596 51.143,6.257 51.052,6.349 51.052,9.276 50.892,9.436 50.892,10.564 51.336,11.008 ; 51.337,11.008 51.456,11.127 51.5,11.127 51.652,11.279 U2.5@52.071,11.279
  Top Layer w0.254: R76.2@48.171,4.779 49.471,4.779 C64.2@49.571,4.879
pads on no net: U1.7 U2.25 U3.5 U8.4 U8.7 U10.1 U10.3 U10.7 U10.8 U12.10 U13.3 U17.2 U17.3 U17.10 U18.2 U18.3 U18.10

## Polygon pours and split planes (outlines as drawn)
SYS_GND on Top Layer "SYS_GND_L01_P281" (solid, remove dead copper, pour order 281): 0,56 74,56 74,0 0,0
4V9 on Top Layer "4V9_L01_P280" (solid, remove dead copper, pour order 280): 19 vertices, not listed, extent 2.5,10 56,53.5
GUARD on Top Layer "SOLDIER_GUARD_L03_P001" (solid, pour order 277): 44.688,29.882 45.755,30.95 49.333,30.95 50.582,29.701 50.582,26.244 49.538,25.2 45.863,25.2 44.688,26.375
GUARD on Top Layer "ACFGUARD" (solid, pour order 265): 383 vertices, not listed, extent 21.727,26.829 48.922,51.283
GUARD on Top Layer "Top Layer-GUARD" (solid, pour order 228): 137 vertices, not listed, extent 21.825,28.379 31.87,32.994
GUARD on Top Layer "PDOUTGUARD" (solid, pour order 275): 580 vertices, not listed, extent 6.38,25.13 24.12,51.283
GUARD on Top Layer "InterconGuard" (solid, pour order 274): 159 vertices, not listed, extent 24.064,30.5 26.859,39.345
GUARD on Top Layer "TIAGUARD" (solid, pour order 276): 290 vertices, not listed, extent 6.38,10.879 13.62,27.621
GUARD on Top Layer "GUARD_L01_P279" (solid, pour order 279): 32.1,30.318 32.1,23.5 29.5,23.5 28.75,24.25 27,24.25 27,30.318
SYS_GND on Bottom Layer "SYS_GND_L04_P001" (solid, remove dead copper, pour order 252): 0,56 74,56 74,0 0,0
GUARD on Bottom Layer "SOLDIER_GUARD_L03_P001" (solid, pour order 148): 44.688,29.882 45.755,30.95 49.333,30.95 50.582,29.701 50.582,26.244 49.538,25.2 45.863,25.2 44.688,26.375
VBAT on Bottom Layer "VBAT_L04_P002" (solid, pour order 248): 64,11.925 64.325,12.25 64.325,14.275 64.075,14.525 57.375,14.525 56.7,13.85 56.7,12.975 57.75,11.925
GUARD on Bottom Layer "GUARD_L04_P003" (solid, pour order 190): 10.433,51.825 14.751,51.825 14.751,47.857 13.481,46.587 11.576,46.587 10.433,47.73
GUARD on Bottom Layer "GUARD_L04_P002" (solid, pour order 245): 8.874,36.025 10.006,36.025 11.15,36.724 11.15,39.463 10.502,39.725 8.77,39.725 8.052,39.482 8.052,36.399
no net on Top Solder "SOLDIER_GUARD_L03_P001" (solid): 44.688,29.882 45.755,30.95 49.333,30.95 50.582,29.701 50.582,26.244 49.538,25.2 45.863,25.2 44.688,26.375
TIA_ADCIN on Top Solder "TIA_ADCIN_L01_P234" (solid, pour order 234): 32.1,30.4 32.1,23.5 29.5,23.5 28.75,24.25 27,24.25 27,30.4
no net on Top Solder (solid): 11.6,20.4 13.5,20.4 13.5,10.4 11.5,10.4
no net on Top Solder "NONET_LTS_P001" (solid): 18 vertices, not listed, extent -0.05,0 74,56
no net on Bottom Solder "SOLDIER_GUARD_L03_P001" (solid, pour order 144): 44.688,29.882 45.755,30.95 49.333,30.95 50.582,29.701 50.582,26.244 49.538,25.2 45.863,25.2 44.688,26.375
GUARD on Bottom Solder "GUARD_L04_P003" (solid, pour order 254): 10.433,51.825 14.751,51.825 14.751,47.857 13.481,46.587 11.576,46.587 10.433,47.73
GUARD on Bottom Solder "GUARD_L04_P001" (solid, pour order 246): 8.874,36.025 10.006,36.025 11.15,36.724 11.15,39.463 10.502,39.725 8.77,39.725 8.052,39.482 8.052,36.399
no net on Bottom Solder "NONET_LBS_P001" (solid): 18 vertices, not listed, extent -0.05,0 74,56
SYS_GND on Layer 2 "SYS_GND_L03_P001" (solid, remove dead copper, pour order 282): 0,56 74,56 74,0 0,0
4V9 on Layer 2 "4V9_L03_P257" (solid, pour order 257): 22 vertices, not listed, extent 2.575,9.849 56.075,53.349
GUARD on Layer 2 "SOLDIER_GUARD_L03_P001" (solid, pour order 184): 44.688,29.882 45.755,30.95 49.333,30.95 50.582,29.701 50.582,26.244 49.538,25.2 45.863,25.2 44.688,26.375
GUARD on Layer 2 "GUARD_L04_P003" (solid, pour order 188): 10.433,51.825 14.751,51.825 14.751,47.857 13.481,46.587 11.576,46.587 10.433,47.73
GUARD on Layer 2 "GUARD_L04_P001" (solid, pour order 191): 8.874,36.025 10.006,36.025 11.15,36.724 11.15,39.463 10.502,39.725 8.77,39.725 8.052,39.482 8.052,36.399
SYS_GND on Layer 1 "SYS_GND_L02_P001" (solid, remove dead copper, pour order 264): 0,56 74,56 74,0 0,0
4V9 on Layer 1 "4V9_L02_P255" (solid, pour order 255): 22 vertices, not listed, extent 2.5,10 56,53.5
GUARD on Layer 1 "SOLDIER_GUARD_L02_P001" (solid, pour order 230): 44.588,29.782 45.655,30.85 49.233,30.85 50.477,29.606 50.477,26.139 49.438,25.1 45.762,25.1 44.588,26.275
GUARD on Layer 1 "ACFGUARD" (solid, pour order 226): 383 vertices, not listed, extent 21.727,26.829 48.922,51.283
GUARD on Layer 1 "IVC_GUARD_SUB" (solid, pour order 159): 137 vertices, not listed, extent 21.805,28.411 31.849,33.026
GUARD on Layer 1 "PDOUTGUARD" (solid, pour order 229): 580 vertices, not listed, extent 6.38,25.13 24.12,51.283
GUARD on Layer 1 "TIA_GUARD_SUB" (solid, pour order 241): 290 vertices, not listed, extent 6.38,10.879 13.62,27.621
GUARD on Layer 1 "GUARD_L02_P238" (solid, pour order 238): 32.1,30.318 32.1,23.5 29.5,23.5 28.75,24.25 27,24.25 27,30.318
GUARD on Layer 1 "InterconGuard" (solid, pour order 219): 159 vertices, not listed, extent 24.064,30.5 26.859,39.345

## Other copper
Top Layer:
  pour cut-out: 25.683,38.691 25.774,38.653 25.939,38.542 26.01,38.472 26.12,38.307 26.158,38.215 26.197,38.02 26.197,37.921 26.158,37.726 26.12,37.635 26.01,37.469 25.97,37.43 25.97,32.457 25.986,32.446 26.057,32.376 26.167,32.21 26.205,32.119 26.244,31.924 26.244,31.825 26.205,31.63 26.167,31.538 26.057,31.373 25.986,31.303 25.821,31.192 25.73,31.154 25.535,31.116 25.435,31.116 25.24,31.154 25.149,31.192 24.984,31.303 24.913,31.373 24.803,31.538 24.765,31.63 24.726,31.825 24.726,31.924 24.765,32.119 24.803,32.21 24.913,32.376 24.953,32.415 24.953,37.388 24.937,37.399 24.866,37.469 24.756,37.635 24.718,37.726 24.679,37.921 24.679,38.02 24.718,38.215 24.756,38.307 24.866,38.472 24.937,38.542 25.102,38.653 25.193,38.691 25.388,38.729 25.488,38.729
  pour cut-out: 9.275,27.004 9.3,27.004 9.397,26.984 9.451,26.962 9.489,26.947 9.571,26.891 9.589,26.874 9.61,26.86 10.11,26.36 10.124,26.339 10.141,26.321 10.197,26.239 10.234,26.147 10.244,26.098 10.254,26.05 10.254,26.025 10.259,26 10.259,19.5 10.254,19.475 10.254,19.45 10.246,19.414 11.944,19.414 12.071,19.541 12.092,19.571 12.162,19.641 12.244,19.697 12.336,19.734 12.433,19.754 12.532,19.754 12.55,19.754 12.647,19.734 12.723,19.703 12.739,19.697 12.821,19.641 12.856,19.606 12.891,19.571 12.947,19.489 12.984,19.397 13.004,19.3 13.004,19.2 12.992,19.139 12.992,16.983 12.987,16.958 12.987,16.933 12.983,16.916 12.987,16.9 12.987,16.875 12.992,16.85 12.992,12.05 12.987,12.025 12.987,12 12.967,11.903 12.936,11.827 12.929,11.811 12.911,11.784 12.874,11.729 12.856,11.711 12.843,11.69 12.793,11.64 12.772,11.626 12.754,11.609 12.671,11.553 12.58,11.516 12.531,11.506 12.482,11.496 12.457,11.496 12.433,11.491 12.25,11.491 12.225,11.496 12.2,11.496 12.103,11.516 12.011,11.553 11.929,11.609 11.859,11.679 11.803,11.761 11.766,11.853 11.746,11.95 11.746,12.05 11.766,12.147 11.803,12.239 11.859,12.321 11.929,12.391 11.974,12.422 11.974,16.85 11.979,16.875 11.979,16.9 11.982,16.916 11.979,16.933 11.979,16.958 11.974,16.983 11.974,18.396 9.212,18.396 9.187,18.401 9.162,18.401 9.065,18.421 8.973,18.458 8.891,18.514 8.821,18.584 8.765,18.666 8.728,18.758 8.708,18.855 8.708,18.955 8.728,19.052 8.764,19.141 8.766,19.147 8.788,19.201 8.803,19.239 8.859,19.321 8.876,19.339 8.89,19.36 9.241,19.711 9.241,25.789 9.039,25.991 7.5,25.991 7.475,25.996 7.45,25.996 7.353,26.016 7.261,26.053 7.179,26.109 7.109,26.179 7.053,26.261 7.016,26.353 6.996,26.45 6.996,26.55 7.016,26.647 7.053,26.739 7.109,26.821 7.179,26.891 7.261,26.947 7.353,26.984 7.45,27.004 7.475,27.004 7.5,27.009 9.25,27.009
  pour cut-out: 13.775,29.504 13.8,29.504 13.897,29.484 13.989,29.447 14.071,29.391 14.141,29.321 14.197,29.239 14.234,29.147 14.254,29.05 14.254,28.95 14.234,28.853 14.197,28.761 14.141,28.679 14.071,28.609 13.989,28.553 13.897,28.516 13.8,28.496 13.775,28.496 13.75,28.491 7.5,28.491 7.475,28.496 7.45,28.496 7.353,28.516 7.261,28.553 7.179,28.609 7.109,28.679 7.053,28.761 7.016,28.853 6.996,28.95 6.996,29.05 7.016,29.147 7.053,29.239 7.109,29.321 7.179,29.391 7.261,29.447 7.353,29.484 7.45,29.504 7.475,29.504 7.5,29.509 13.75,29.509
  pour cut-out: 23.092,32.359 23.146,32.337 23.184,32.321 23.266,32.266 23.284,32.248 23.305,32.234 25.53,30.009 30.75,30.009 30.775,30.004 30.8,30.004 30.897,29.984 30.989,29.947 31.071,29.891 31.141,29.821 31.197,29.739 31.234,29.647 31.254,29.55 31.254,29.45 31.234,29.353 31.197,29.261 31.141,29.179 31.071,29.109 30.989,29.053 30.897,29.016 30.8,28.996 30.775,28.996 30.75,28.991 25.319,28.991 25.295,28.996 25.27,28.996 25.172,29.016 25.097,29.047 25.081,29.053 25.053,29.072 24.998,29.109 24.98,29.126 24.96,29.14 22.585,31.515 22.571,31.535 22.554,31.553 22.498,31.636 22.461,31.727 22.441,31.825 22.441,31.924 22.461,32.021 22.483,32.075 22.498,32.113 22.554,32.196 22.6,32.242 22.624,32.266 22.706,32.321 22.798,32.359 22.895,32.378 22.995,32.378
  pour cut-out: 25.585,50.647 25.639,50.625 25.677,50.61 25.759,50.554 25.777,50.537 25.798,50.523 25.88,50.441 25.894,50.42 25.911,50.402 25.967,50.32 26.004,50.228 26.014,50.179 26.024,50.131 26.024,50.106 26.029,50.081 26.029,47.27 26.024,47.245 26.024,47.22 26.004,47.123 25.982,47.069 25.967,47.031 25.947,47.001 25.947,44.08 25.953,44.05 25.953,44 25.953,43.95 25.937,43.872 25.911,43.81 25.899,43.781 25.855,43.715 25.785,43.645 25.719,43.601 25.69,43.589 25.628,43.563 25.55,43.547 25.5,43.547 25.45,43.547 25.395,43.558 25.388,43.558 25.291,43.578 25.199,43.615 25.117,43.671 25.047,43.741 24.991,43.823 24.954,43.915 24.934,44.012 24.934,44.037 24.929,44.062 24.929,47.188 24.934,47.212 24.934,47.237 24.954,47.335 24.976,47.388 24.991,47.426 25.011,47.456 25.011,49.895 24.991,49.924 24.954,50.016 24.934,50.113 24.934,50.213 24.954,50.31 24.976,50.364 24.991,50.402 25.047,50.484 25.093,50.531 25.117,50.554 25.199,50.61 25.291,50.647 25.388,50.667 25.488,50.667
  pour cut-out: 225 vertices and 0 holes, not listed, extent 9.046,25.746 23.504,50.667
  pour cut-out: 22.948,44.622 23.065,44.598 23.14,44.567 23.156,44.56 23.255,44.494 23.273,44.476 23.294,44.463 26.697,41.06 27.75,41.06 27.774,41.055 27.8,41.055 27.917,41.032 27.992,41 28.008,40.994 28.107,40.927 28.125,40.91 28.146,40.896 33.232,35.81 45.5,35.81 45.524,35.805 45.55,35.805 45.667,35.782 45.742,35.75 45.758,35.744 45.857,35.677 45.875,35.66 45.896,35.646 48.146,33.396 48.16,33.375 48.177,33.357 48.217,33.298 48.244,33.258 48.256,33.229 48.282,33.167 48.305,33.05 48.305,33.024 48.31,33 48.31,28.114 48.305,28.089 48.305,28.064 48.282,27.947 48.25,27.871 48.244,27.856 48.182,27.764 48.177,27.757 48.16,27.739 48.146,27.718 48.032,27.604 48.011,27.59 47.993,27.573 47.894,27.506 47.872,27.497 47.803,27.468 47.686,27.445 47.636,27.445 47.587,27.445 47.47,27.468 47.394,27.5 47.378,27.506 47.279,27.573 47.244,27.608 47.209,27.643 47.143,27.742 47.133,27.764 47.105,27.833 47.081,27.95 47.081,28 47.081,28.05 47.105,28.167 47.136,28.242 47.143,28.258 47.19,28.33 47.19,32.768 45.268,34.69 33,34.69 32.976,34.695 32.95,34.695 32.833,34.718 32.758,34.75 32.742,34.756 32.643,34.823 32.625,34.84 32.604,34.854 27.518,39.94 26.465,39.94 26.44,39.945 26.415,39.945 26.298,39.968 26.222,40 26.207,40.006 26.108,40.073 26.09,40.09 26.069,40.104 22.502,43.671 22.488,43.692 22.471,43.71 22.404,43.809 22.395,43.831 22.366,43.9 22.343,44.017 22.343,44.067 22.343,44.116 22.366,44.233 22.398,44.309 22.404,44.325 22.471,44.424 22.506,44.459 22.541,44.494 22.64,44.56 22.662,44.57 22.731,44.598 22.848,44.622 22.898,44.622

## Silkscreen, mask and mechanical layers (free items; w line width, h text height)
Top Overlay:
  drawing of 3378 lines, arcs and shapes, not listed
  text "ALTAIR PD Readout-" at 39.4,52.421 h2
  text "Soldier" at 57.489,52.349 h2
  text ".Revision" at 56.686,51.174 h1.5
  text "D.R., / P.D.B., / N.S." at 56.75,45.876 h2
  text "Temp OUT" at 61.2,45.811 h1.2
  text "UVIC" at 51.85,44.221 h2
  text "IVC" at 27.1,32.613 h1.2
  text "PHOTODIODE / IN/OUT" at 6.356,30.809 h1.2
  text "VGND Isolator" at 53.35,25.363 h1.2
  text "Bias" at 42.821,23.067 h1.2
  text "WayWayWay" at 34.533,22.7 h0.8 r90
  text "Level Shift Amps" at 31.497,20.553 h1.2
  text "AA Filters" at 42.898,16.284 h1.2
  text "ADC" at 51.687,16.222 h1.2
  text "2.5Adc" at 60.3,13.713 h1.2
  text "5VSW" at 20.4,13.615 h1.2
  text "4v9" at 25.4,13.515 h1.2
  text "CLK / OUT" at 65.956,13 h1.2
  text "BiasV" at 20.411,11.528 h1.2
  text "-11V" at 24.9,11.4 h1.2
  text "10V" at 20.411,9.228 h1.2
  text "2.5V" at 24.9,9.113 h1.2
  text "TIA" at 2.359,8.34 h1.2
  text "AMP OUT" at 37.639,7.713 h1.2
  text "2.5Vref" at 18.639,7.706 h1.2
  text "AVDD" at 44.359,2.151 h1.2
Bottom Overlay:
  lines w0.2: 31.6,53.9 31.6,45.8 31.7,45.7 44.1,45.7 ; 44.1,54 44.1,43.9 ; 45.8,14.9 45.8,2.1 48.6,2.1 65.2,2.1 65.2,11.5 65.2,17.5 48.3,17.5 48.2,17.5 ; 49,33.5 49.5,34 ; 49,34 49.5,34 ; 49,34.5 49.5,34 ; 57.5,41.5 57.5,35 59,33.5 60,33.5 ; 58.9,41.4 54.9,41.4 52.4,43.9 44.1,43.9 ; 59,41.4 59,41.5 59.5,42 ; 59.3,32.4 60,32.4 60,31.7 ; 60,26 63,26 ; 63,17.5 63,33.5 ; 63.5,46 65.6,48.1 65.6,53.9 ; 44.1,43.9 44.1,43.9 ; 48.2,17.5 48.2,15 48.1,14.9 47.4,14.9 38.4,14.9 38.4,21.7 38.4,22.1 48.2,22.1 48.2,21.7 48.2,17.5 ; 49.5,34 49.5,34
  text "-16V" at 65.4,53.013 h1.2
  text "-11V Regulator" at 39.2,46.126 h1.2
  text "VGND" at 62.9,32.613 h1.2
  text "5VSW" at 62.9,17.615 h1.2
  text "10V Regulator" at 65.1,16.626 h1.2
  text "TP4" at 50.7,16.2 h0.8
  text "TP8" at 62.3,15.2 h0.8
  text "AVDD 5V" at 48.1,15.013 h1.2
  text "TP5" at 26.7,14.7 h0.8
  text "TP6" at 23,14.6 h0.8
  text "4v9" at 26.7,13.715 h1.2
  text "5VSW" at 23.5,13.615 h1.2
  text "TP1" at 26.7,12.4 h0.8
  text "TP7" at 23.1,12.3 h0.8
  text "-11V" at 26.8,11.3 h1.2
  text "BiasV" at 23.3,11.213 h1.2
  text "TP2" at 26.7,9.9 h0.8
  text "TP3" at 23,9.8 h0.8
  text "10V" at 22.8,8.713 h1.2
  text "2.5V" at 26.7,8.713 h1.2
  text "TP9" at 51.2,3.9 h0.8

## Dimensions
74,0 to 74,56 on Mechanical 1
0,0 to 74,0 on Mechanical 1